# Altium PCB CORE_FPGA.PcbDoc (part 3 of 3)
Units mil, origin at the board's own origin, x right, y up, seen from the top; angles counter-clockwise.
Board outline 2362.21 x 2755.91 mil, 6 copper layers (TOP, GND, PWR1, PWR2, 3.3V, BOTTOM), stack 58.111 mil thick; 162 components, 160 nets, 858 pads, 377 vias.
Unrouted connection lines stored in the file: 4.
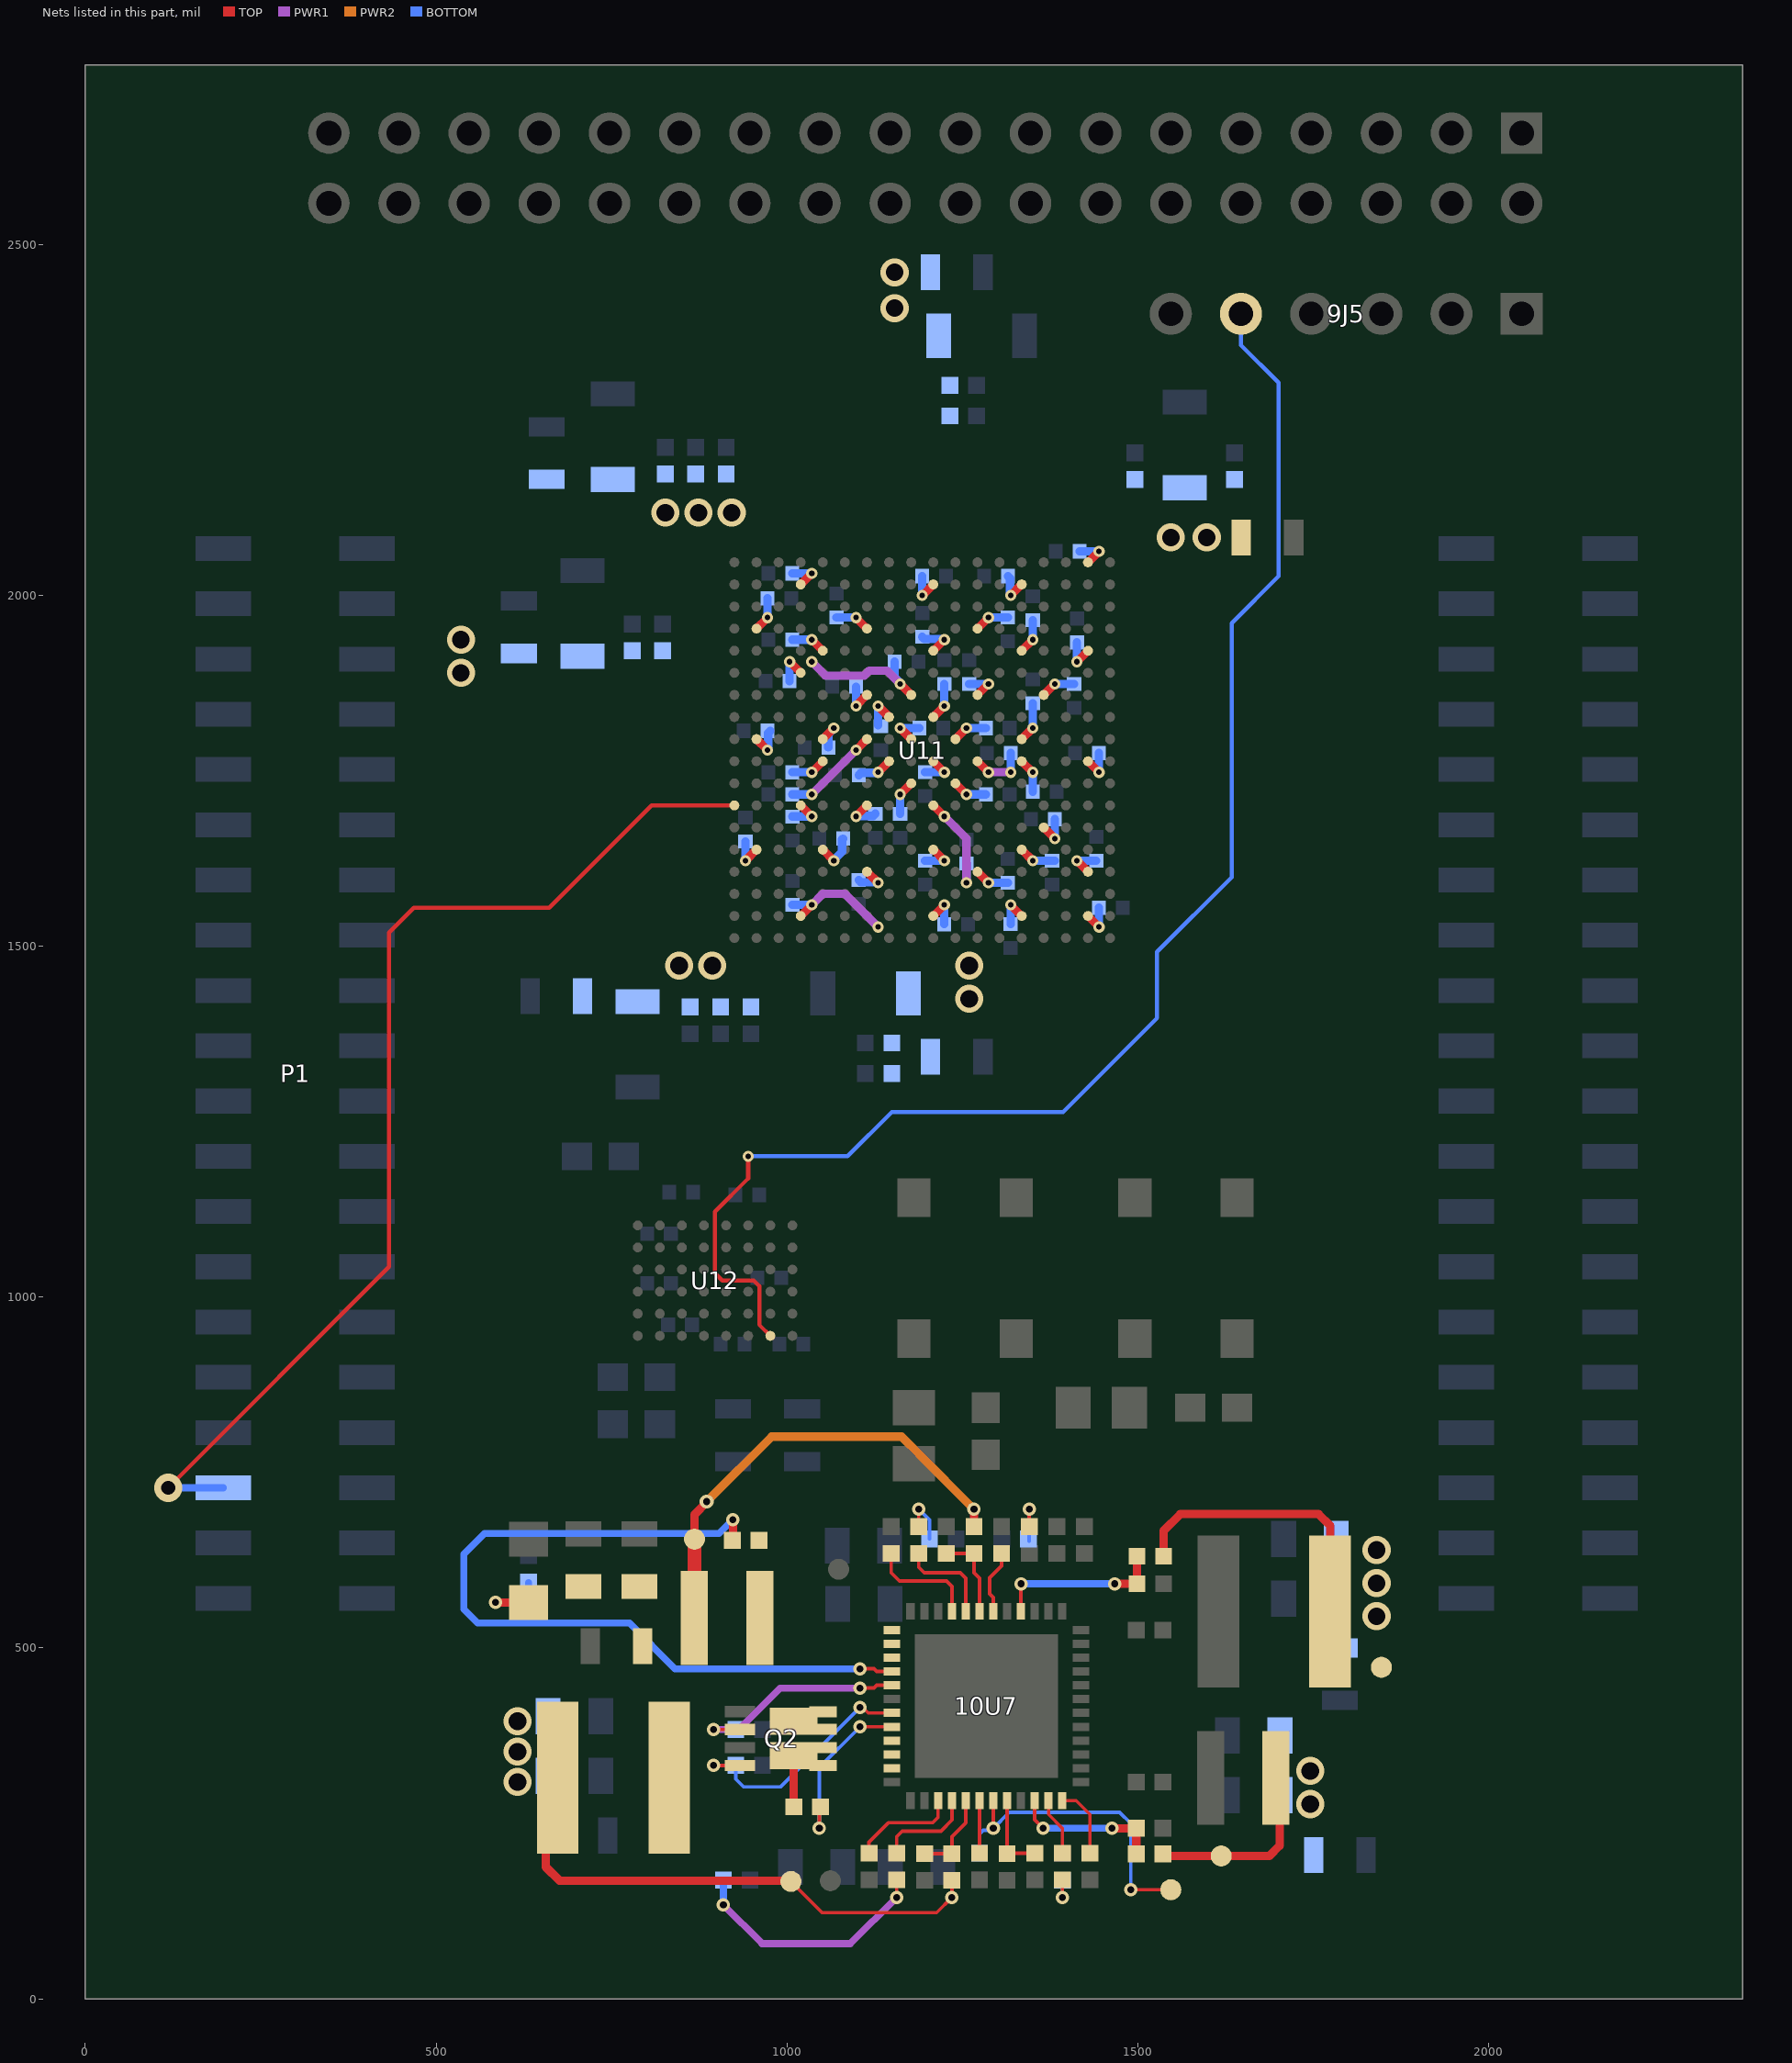
[diagram p7: the nets of this part, all layers, seen from the top]

## Via types
v1: diameter 16, hole 8, TOP to BOTTOM, 150 vias
v2: diameter 40, hole 25, TOP to BOTTOM, 114 vias
v3: diameter 19, hole 10, TOP to BOTTOM, 44 vias
v4: diameter 40, hole 20, TOP to BOTTOM, 44 vias
v5: diameter 20, hole 10, TOP to BOTTOM, 23 vias
v6: diameter 16, hole 10, TOP to BOTTOM, 2 vias

## Nets (pads, with @x,y where several pads share a name; then routed paths per layer and width w, separated by ;. In a path a pad name is that pad's centre, name@x,y a point inside that pad or via, vN(x,y) a via of type N, cw(c..) or ccw(c..) an arc to the next point about the centre after c; other vN are vias at no path point) (continued)
Net10U7_16: 10U7.16 R1134.2 R1135.2 | length 244.1
  TOP w5: 10U7.16@1333.59,552.13 v3(1333.59,591.5)
  TOP w12: v3(1467.45,591.5) R1135.2@1498.95,591.5 R1134.2@1498.95,630.87
  BOTTOM w10: v3(1333.59,591.5) v3(1467.45,591.5)
Net10U7_18: 10U7.18 R11118.2 | length 91.9
  TOP w5: 10U7.18@1294.22,552.13 1294.22,571.81 1289.03,577 1289.03,600.06 1306.03,617.06 R11118.2@1306.03,634.8
Net10U7_19: 10U7.19 R1130.1 R1131.1 | length 125.3
  TOP w5: R1131.1@1227.29,634.8 R1130.1@1266.66,634.8 1266.66,607.25 1274.54,599.37 10U7.19@1274.54,552.13
Net10U7_20: 10U7.20 R1119.2 | length 140.4
  TOP w5: R1119.2@1187.92,634.8 1187.92,615.12 1195.8,607.25 1246.98,607.25 1254.85,599.37 10U7.20@1254.85,552.13
Net10U7_21: 10U7.21 R1120.2 | length 157.8
  TOP w5: R1120.2@1148.55,634.8 1148.55,607.25 1160.37,595.43 1227.29,595.43 1235.17,587.56 10U7.21@1235.17,552.13
Net10U7_25: 10U7.25 10U7.26 10U7.27 C1019.1 L220.1 Q2.D1
Net10U7_28: 10U7.28 C1019.2 | length 1163.9
  TOP w5: C1019.2@923.16,652.91 C1019.2@924.53,651.54 ; v3(1104.26,470.43) 1123.95,470.43 1127.89,466.5 10U7.28@1149.54,466.5 10U7.28@1151.51,466.5
  TOP w12: C1019.2@923.16,652.91 v3(923.16,683.03)
  BOTTOM w10: v3@923.2,683.07 v3(923.16,683.03) 903.51,663.39 568.9,663.39 539.37,633.86 539.37,555.12 559.05,535.43 775.59,535.43 840.59,470.43 v3(1104.26,470.43)
Net10U7_29: 10U7.29 Q2.G1 R1129.2 | length 351.2
  TOP w5: v3(895.6,383.82) 933.2,383.82 Q2.G1@933.28,383.74 ; v3(1104.26,442.88) 1123.95,442.88 1127.89,446.81 10U7.29@1151.51,446.81
  PWR1 w10: v3(895.6,383.82) 931.2,383.82 990.26,442.88 v3(1104.26,442.88)
  BOTTOM w5: v3(895.6,383.82) R1129.2@927.1,383.82
Net10U7_31: 10U7.31 Q2.G2 R1128.1 | length 366.1
  TOP w5: v3(895.6,332.64) 933.2,332.64 Q2.G2@933.28,332.56 ; v3(1104.26,415.32) 1108.05,415.32 1115.93,407.44 10U7.31@1149.54,407.44
  BOTTOM w5: v3(895.6,332.64) R1128.1@927.1,332.64 927.1,313.14 938.05,302.18 991.13,302.18 1102.54,413.59 v3@1102.54,416.36
Net10U7_32: 10U7.32 C1016.1 | length 245.2
  TOP w5: v3(1046.19,243.07) 1046.19,272 C1016.1@1047.78,273.58 ; v3(1104.26,387.76) 10U7.32@1149.54,387.76
  BOTTOM w5: v3(1046.19,243.07) 1046.19,329.69 v3(1104.26,387.76)
Net10U7_33: 10U7.33 10U7.34 10U7.35 C1016.2 L218.1 Q2.D2 | length 70.9
  TOP w12: C1016.2@1009.78,273.58 Q2.D2@1009.78,344.45
Net10U7_39: 10U7.39 R1117.2 | length 152.5
  TOP w5: R1117.2@1117.06,207.64 1117.06,223.39 1144.62,250.95 1207.61,250.95 1215.48,258.82 10U7.39@1215.48,282.44
Net10U7_40: 10U7.40 R1116.2 | length 139.7
  TOP w5: R1116.2@1156.43,207.64 1156.43,231.26 1164.3,239.14 1219.42,239.14 1235.17,254.88 10U7.40@1235.17,282.44
Net10U7_41: 10U7.41 R1126.2 R1127.2 | length 122.6
  TOP w5: R1127.2@1195.8,207.64 R1127.2@1196.47,206.97 R1126.2@1235.16,206.97 ; R1126.2@1235.17,207.64 1235.17,231.26 1254.85,250.95 10U7.41@1254.85,282.44
Net10U7_42: 10U7.42 R1136.1 | length 74.8
  TOP w5: R1136.1@1274.54,207.64 10U7.42@1274.54,282.44
Net10U7_43: 10U7.43 C1014.1 TP110.1 | length 453.2
  TOP w5: v3(1294.22,243.07) 10U7.43@1294.22,282.44 ; v3(1490.09,155.47) TP110.1@1547.18,155.47
  BOTTOM w5: C1014.1@1274.54,207.64 1274.54,235.2 1279.73,240.39 1291.55,240.39 v3(1294.22,243.07) 1316.86,265.71 1474.34,265.71 1490.09,249.96 v3(1490.09,155.47)
Net10U7_44: 10U7.44 R1137.2 R1144.1 | length 114.5
  TOP w5: R1137.2@1313.9,206.97 1314.57,207.64 R1144.1@1353.28,207.64 ; R1137.2@1313.91,207.64 10U7.44@1313.91,282.44
Net10U7_46: 10U7.46 R1132.1 R1133.2 | length 217.7
  TOP w5: 10U7.46@1353.28,282.44 1353.28,255.3 1365.09,243.49 v3(1365.09,243.07)
  TOP w12: v3(1463.52,243.07) R1133.2@1497.96,243.07 R1132.1@1497.96,206.66 R1132.1@1495.01,203.7
  BOTTOM w10: v3(1365.09,243.07) v3(1463.52,243.07)
Net10U7_47: 10U7.47 R1121.2 | length 83
  TOP w5: 10U7.47@1372.96,282.44 1372.96,262.76 1392.65,243.07 R1121.2@1392.65,207.64
Net10U7_48: 10U7.48 R1154.2 | length 102.6
  TOP w5: 10U7.48@1392.65,282.44 1412.33,282.44 1432.02,262.76 R1154.2@1432.02,207.64
NetC1007_2: C1007.2 R1116.1 | length 356.9
  TOP w5: v3(1156.43,144.65) R1116.1@1156.43,168.95
  PWR1 w10: v3(909.45,133.86) 964.57,78.74 1090.52,78.74 v3(1156.43,144.65)
  BOTTOM w10: v3(909.45,133.86) C1007.2@909.45,169.29
NetC1009_2: C1009.2 R1119.1 | length 75.2
  TOP w5: R1119.1@1187.92,672.8 v3(1187.92,697.8)
  BOTTOM w5: v3@1188.31,699.25 1188.31,697.41 1203.31,682.41 C1009.2@1203.31,655.25
NetC1010_2: C1010.2 R1121.1 | length 47.9
  TOP w5: v3(1392.65,144.65) R1121.1@1392.65,168.95
  BOTTOM w5: v3(1392.65,144.65) C1010.2@1392.65,168.25
NetC1013_2: C1013.2 R1124.1 | length 70.6
  TOP w5: R1124.1@1345.41,672.8 v3(1345.41,697.8)
  BOTTOM w5: C1013.2@1345.31,652.25 1345.41,652.35 v3(1345.41,697.8)
NetC1017_2: C1017.2 C1018.2 L218.2 L219.1 R1126.1 TP12.1 | length 722.4
  TOP w5: TP12.1@1005.84,167.29 1050.33,122.8 1213.32,122.8 v3(1235.17,144.65) R1126.1@1235.17,168.95
  TOP w12: L218.2@656.43,270.63 656.43,187.95 676.11,168.27 TP12.1@1006.82,168.27
  other v2: 616.07,309.02 616.07,352.32 616.07,395.63
NetC1020_2: C1020.2 C1021.2 L220.2 L221.1 R1130.2 TP13.1 | length 624.5
  TOP w12: TP13.1@868.28,655.53 868.28,690.04 885.83,707.58 v5(885.83,708.66) ; R1130.2@1266.66,672.8 v3(1266.66,697.8)
  TOP w20: L220.2@864.11,580.67 868.34,584.9 TP13.1@868.34,655.18 TP13.1@868.04,655.47
  PWR2 w12: v5(885.83,708.66) 978.35,801.18 1163.39,801.18 1188.98,775.59 1188.98,775.49 1264.38,700.08 1267.01,700.08 v3@1267.72,700.79
NetC1023_2: C1023.2 C1024.2 L222.2 L223.1 R1132.2 TP14.1 | length 268.2
  TOP w12: R1132.2@1536.77,203.7 TP14.1@1619.03,203.7 1687.75,203.7 1702.32,218.27 L222.2@1702.32,314.92
  other v2: 1746,277.52 1746,324.77
NetC1026_2: C1026.2 C1027.2 L224.2 L225.1 R1134.1 TP15.1 | length 423.1
  TOP w12: R1134.1@1536.95,630.87 1536.95,667.08 1560.78,690.91 1757.81,690.91 1774.36,674.35 1774.36,544.92 L224.2@1772,542.55
  other v2: 1840.48,545.24 1840.48,592.48 1840.48,639.73
NetLED5_2: LED5.2 R1138.1 | length 118.1
  TOP w12: v3(584.58,564.92) LED5.2@631.82,564.92
  BOTTOM w10: v3(584.58,564.92) 623.95,564.92 631.82,572.8 R1138.1@631.82,593.17
OP_LED: P1.35 U11.V12 | length 1567.7
  TOP w6: v4(118.11,728.35) 433.07,1043.31 433.07,1519.68 468.5,1555.12 661.42,1555.12 807.09,1700.79 U11.V12@925.2,1700.79
  BOTTOM w10: v4(118.11,728.35) P1.35@196.85,728.35
TDI: 9J5.5 U12.G1 | length 2098
  TOP w6: v1(944.88,1200.79) 944.88,1169.29 897.64,1122.05 897.64,1033.91 907.92,1023.62 952.76,1023.62 960.63,1015.75 960.63,960.63 U12.G1@976.38,944.88
  BOTTOM w6: v1(944.88,1200.79) 1086.61,1200.79 1149.61,1263.78 1393.7,1263.78 1527.56,1397.64 1527.56,1492.13 1633.86,1598.43 1633.86,1960.63 1700.79,2027.56 1700.79,2303.15 1647.24,2356.69 9J5.5@1647.24,2401.57 9J5.5@1645.67,2401.57
VCCAUX: 10C37.1 10C38.2 10C39.2 10C40.2 10C41.2 10C42.2 10C43.2 10C44.2 10C45.2 10C46.2 10C47.2 10C48.2 10C49.2 10C50.2 10C51.2 10C52.2 10L5.1 U11.B1 U11.B17 U11.E5 U11.E9 U11.E14 U11.G10 U11.J12 U11.K7 U11.M9 U11.P5 U11.P10 U11.P14 | length 995.5
  TOP w12: v1(1035.43,1748.03) U11.P10@1051.18,1763.78 ; v1(1035.43,1937.01) U11.P5@1051.18,1921.26 ; U11.P14@1051.18,1637.8 v1(1066.93,1622.05) ; v1(1098.43,1779.53) U11.M9@1114.17,1795.28 ; v1(1161.42,1874.02) U11.K7@1177.17,1858.27 ; U11.J12@1208.66,1700.79 v1(1224.41,1685.04) ; U11.G10@1271.65,1763.78 v1(1287.4,1748.03) ; U11.E14@1334.65,1637.8 v1(1350.39,1622.05) ; U11.E9@1334.65,1795.28 v1(1350.39,1811.02) ; U11.E5@1334.65,1921.26 v1(1350.39,1937.01) ; U11.B17@1429.13,1543.31 v1(1444.88,1527.56) ; U11.B1@1429.13,2047.24 v1(1444.88,2062.99)
  PWR1 w12: v1(1035.43,1716.54) v1(1098.43,1779.53) ; v1(1035.43,1905.51) 1055.12,1885.83 1110.38,1885.83 1117.57,1893.02 1142.42,1893.02 v1(1161.42,1874.02) ; v1(1224.41,1685.04) 1255.91,1653.54 v1(1255.91,1590.55) ; v1(1287.4,1748.03) v1(1318.9,1748.03)
  BOTTOM w12: 10C41.2@1007.87,1716.54 v1(1035.43,1716.54) ; 10C40.2@1007.87,1748.03 v1(1035.43,1748.03) ; 10C42.2@1007.87,1937.01 v1(1035.43,1937.01) ; v1(1066.93,1622.05) 1066.93,1623.13 1078.74,1634.94 1078.74,1652.29 10C48.2@1079.99,1653.54 ; 10C43.2@1153.54,1905.51 1153.54,1882.97 1161.42,1875.1 v1(1161.42,1874.02) ; v1(1255.91,1590.55) 10C52.2@1255.91,1618.11 ; v1(1318.9,1748.03) 10C45.2@1318.9,1775.59 ; v1(1350.39,1622.05) 10C51.2@1377.95,1622.05 10C51.2@1381.89,1622.05 ; v1(1350.39,1811.02) 10C49.2@1350.39,1846.46 ; v1@1350.39,1940.94 10C44.2@1350.39,1964.57 ; 10C50.2@1417.32,2062.99 v1(1444.88,2062.99) ; v1(1444.88,1527.56) 10C47.2@1444.88,1555.12
  other v2: 846.46,1472.44 893.7,1472.44
VCCINT: 10C53.1 10C54.2 10C55.2 10C56.2 10C57.2 10C58.2 10C59.2 10C60.2 10C61.2 10C62.2 10C63.2 10C64.2 10C65.2 10C66.2 10C67.2 10L6.1 U11.G7 U11.H9 U11.H11 U11.J8 U11.J10 U11.K9 U11.K11 U11.L8 U11.L10 U11.M7 U11.M12 | length 555.3
  TOP w12: v1(1098.43,1685.04) U11.M12@1114.17,1700.79 ; v1(1098.43,1842.52) U11.M7@1114.17,1858.27 ; v1(1129.92,1748.03) U11.L10@1145.67,1763.78 ; v1(1129.92,1842.52) U11.L8@1145.67,1826.77 ; v1(1161.42,1716.54) U11.K11@1177.17,1732.28 ; v1(1161.42,1811.02) U11.K9@1177.17,1795.28 ; U11.J10@1208.66,1763.78 v1(1224.41,1748.03) ; U11.J8@1208.66,1826.77 v1(1224.41,1842.52) ; U11.H11@1240.16,1732.28 v1(1255.91,1716.54) ; U11.H9@1240.16,1795.28 v1(1255.91,1811.02) ; U11.G7@1271.65,1858.27 v1(1287.4,1874.02)
  BOTTOM w12: v1(1098.43,1685.04) 1099.19,1685.8 1122.81,1685.8 10C67.2@1125.98,1688.98 ; v1(1098.43,1842.52) 10C59.2@1098.43,1870.08 ; 10C58.2@1102.36,1744.09 1105.53,1747.27 1129.16,1747.27 v1(1129.92,1748.03) ; 10C66.2@1129.92,1814.96 v1(1129.92,1842.52) ; 10C64.2@1161.42,1688.98 v1(1161.42,1716.54) ; v1(1161.42,1811.02) 10C60.2@1188.98,1811.02 ; 10C65.2@1196.85,1748.03 v1(1224.41,1748.03) ; v1(1224.41,1842.52) 10C57.2@1224.41,1874.02 ; v1(1255.91,1716.54) 10C61.2@1283.46,1716.54 ; v1(1255.91,1811.02) 10C56.2@1283.46,1811.02 ; 10C63.2@1259.84,1874.02 v1(1287.4,1874.02)
  other v2: 826.77,2118.11 874.02,2118.11 921.26,2118.11
VCCO_B0: 3.1 10C1.1 10C2.2 10C3.2 10C4.2 10C5.2 10C6.2 10C7.2 10C8.2 10C9.2 U11.B5 U11.B10 U11.B15 U11.D7 U11.D13 U11.E10 | length 299
  TOP w12: U11.E10@1334.65,1763.78 v1(1350.39,1748.03) ; U11.D13@1366.14,1669.29 v1(1381.89,1653.54) ; U11.D7@1366.14,1858.27 v1(1381.89,1874.02) ; v1(1413.39,1622.05) U11.B15@1429.13,1606.3 ; v1(1413.39,1905.51) U11.B5@1429.13,1921.26 ; U11.B10@1429.13,1763.78 v1(1444.88,1748.03)
  BOTTOM w12: 10C7.2@1350.39,1720.47 v1(1350.39,1748.03) ; v1(1381.89,1653.54) 10C5.2@1381.89,1681.1 ; v1(1381.89,1874.02) 10C6.2@1409.45,1874.02 ; v1(1413.39,1622.05) 10C9.2@1440.94,1622.05 ; v1(1413.39,1905.51) 10C8.2@1413.39,1933.07 ; v1(1444.88,1748.03) 10C4.2@1444.88,1775.59
  other v2: 1547.24,2082.68 1598.43,2082.68
VCCO_B1: 10C10.1 10C11.2 10C12.2 10C13.2 10C14.2 10C15.2 10C16.2 10C17.2 10C18.2 10L2.1 U11.E17 U11.G15 U11.J14 U11.J17 U11.M15 U11.R17 | length 421.2
  TOP w12: U11.R17@1019.69,1543.31 v1(1035.43,1559.06) ; U11.M15@1114.17,1606.3 v1(1129.92,1590.55) ; U11.J17@1208.66,1543.31 v1(1224.41,1559.06) ; U11.J14@1208.66,1637.8 v1(1224.41,1622.05) ; U11.G15@1271.65,1606.3 v1(1287.4,1590.55) ; v1(1318.9,1559.06) U11.E17@1334.65,1543.31
  PWR1 w12: v1(1035.43,1559.06) 1051.18,1574.8 1082.68,1574.8 v1(1129.92,1527.56)
  BOTTOM w12: 10C13.2@1007.87,1559.06 v1(1035.43,1559.06) ; 10C17.2@1102.36,1594.49 1105.53,1591.32 1129.16,1591.32 v1(1129.92,1590.55) ; 10C14.2@1196.85,1622.05 v1(1224.41,1622.05) ; 10C16.2@1224.41,1531.5 v1(1224.41,1559.06) ; v1(1287.4,1590.55) 10C18.2@1314.96,1590.55 ; 10C15.2@1318.9,1531.5 v1(1318.9,1559.06)
  other v2: 1259.84,1425.2 1259.84,1472.44
VCCO_B2: 10C19.1 10C20.2 10C21.2 10C22.2 10C23.2 10C24.2 10C25.2 10C26.2 10C27.2 10L3.1 U11.P9 U11.R6 U11.R12 U11.U4 U11.U9 U11.U14 | length 303.9
  TOP w12: v1(940.94,1622.05) U11.U14@956.69,1637.8 ; U11.U9@956.69,1795.28 v1(972.44,1779.53) ; U11.U4@956.69,1952.76 v1(972.44,1968.5) ; v1(1003.94,1905.51) U11.R6@1019.69,1889.76 ; U11.R12@1019.69,1700.79 v1(1035.43,1685.04) ; U11.P9@1051.18,1795.28 v1(1066.93,1811.02)
  BOTTOM w12: v1(940.94,1622.05) 10C23.2@940.94,1649.61 ; v1(972.44,1779.53) 973.21,1780.29 973.21,1803.91 10C24.2@976.38,1807.09 ; v1(972.44,1968.5) 10C22.2@972.44,1996.06 ; 10C25.2@1003.94,1877.95 v1(1003.94,1905.51) ; 10C26.2@1007.87,1685.04 v1(1035.43,1685.04) ; 10C27.2@1059.06,1783.46 1059.06,1802.07 1066.93,1809.94 v1(1066.93,1811.02)
  other v2: 535.43,1889.76 535.43,1937.01
VCCO_B3: 10C28.1 10C29.2 10C30.2 10C31.2 10C32.2 10C33.2 10C34.2 10C35.2 10C36.2 10L4.1 U11.E2 U11.G4 U11.J2 U11.J5 U11.M4 U11.R2 | length 306.2
  TOP w12: U11.R2@1019.69,2015.75 v1(1035.43,2031.5) ; v1(1098.43,1968.5) U11.M4@1114.17,1952.76 ; v1(1192.91,2000) U11.J2@1208.66,2015.75 ; U11.J5@1208.66,1921.26 v1(1224.41,1937.01) ; U11.G4@1271.65,1952.76 v1(1287.4,1968.5) ; v1(1318.9,2000) U11.E2@1334.65,2015.75
  BOTTOM w12: 10C34.2@1007.87,2031.5 v1(1035.43,2031.5) ; 10C36.2@1070.87,1968.5 v1(1098.43,1968.5) ; 10C32.2@1192.91,1940.94 1196.09,1937.77 1223.64,1937.77 v1(1224.41,1937.01) ; v1(1192.91,2000) 10C31.2@1192.91,2027.56 ; v1(1287.4,1968.5) 10C33.2@1314.96,1968.5 ; 10C35.2@1314.96,2027.56 1318.13,2024.39 1318.13,2000.77 v1(1318.9,2000)
  other v2: 1153.54,2409.45 1153.54,2460.63
pads on no net: U11.A5 U11.A6 U11.A14 U11.A16 U11.B16 U11.C4 U11.C5 U11.C6 U11.C8 U11.C9 U11.C10 U11.C11 U11.C12 U11.C14 U11.C15 U11.D4 U11.D9 U11.D11 U11.D12 U11.D14 U11.E3 U11.E4 U11.E6 U11.E7 U11.E8 U11.E11 U11.E12 U11.E13 U11.F4 U11.F5 U11.F6 U11.F7 U11.F8 U11.F9 U11.F10 U11.F11 U11.F12 U11.F13 U11.F14 U11.F15 U11.F16 U11.G3 U11.G6 U11.G8 U11.G9 U11.G11 U11.G13 U11.G14 U11.G16 U11.G18 U11.H3 U11.H4 U11.H5 U11.H6 U11.H7 U11.H12 U11.H13 U11.H14 U11.H15 U11.H16 U11.H18 U11.J6 U11.J7 U11.J13 U11.J16 U11.J18 U11.K5 U11.K6 U11.K12 U11.K13 U11.K14 U11.K15 U11.K16 U11.K17 U11.K18 U11.L5 U11.L7 U11.L12 U11.L13 U11.L14 U11.L16 U11.L17 U11.L18 U11.M5 U11.M8 U11.M10 U11.M11 U11.M13 U11.M14 U11.M16 U11.M18 U11.N3 U11.N4 U11.N5 U11.N7 U11.N8 U11.N9 U11.N10 U11.N11 U11.N12 U11.N14 U11.N15 U11.N17 U11.P3 U11.P4 U11.P6 U11.P8 U11.P11 U11.P12 U11.P13 U11.P15 U11.P16 U11.R3 U11.R5 U11.R7 U11.R11 U11.T3 U11.T4 U11.T7 U11.T8 U11.T9 U11.T10 U11.T11 U11.T12 U11.T13 U11.T15 U11.U7 U11.U8 U11.U16 U11.V3 U11.V7 U11.V8 U11.V9 U11.V16 U12.A4 U12.A5 U12.A6 U12.B5 U12.C1 U12.C2 U12.C3 U12.C4 U12.C5 U12.D2 U12.D3 U12.D4 U12.D5 U12.E3 U12.E4 U12.E5 U12.F2 U12.F3 U12.F4 U12.G2 U12.H5

## Polygon pours and split planes (outlines as drawn)
no net on Top Overlay (solid): 196.85,2755.91 0,2559.06 0,2755.91
FLASH_1.8V on PWR1 "PWR1-FLASH_1.8V" (solid, pour order 32): 1897.64,309.06 1799.21,309.06 1779.53,289.37 1779.53,259.84 1759.84,240.16 1730.31,240.16 1710.63,259.84 1710.63,594.49 1631.89,673.23 1080.71,673.23 1061.02,692.91 1061.02,751.97 1051.18,761.81 972.44,761.81 962.6,751.97 962.6,535.43 992.13,505.91 1533.46,505.91 1572.83,466.54 1572.83,151.58 1612.2,112.2 1897.64,112.2 1917.32,131.89 1917.32,289.37
CFPGA_2.5V on PWR1 "PWR1-CFPGA_2.5V" (solid, pour order 36): 1781.5,328.74 1730.31,379.92 1730.31,639.76 1312.99,1057.09 1198.82,1057.09 903.54,1352.36 559.06,1352.36 529.53,1381.89 529.53,1529.53 559.06,1559.06 992.13,1559.05 1031.5,1519.68 1070.87,1519.68 1307.09,1283.46 1444.88,1283.46 1966.54,761.81 1966.54,358.27 1937.01,328.74
CFPGA_1.2V on PWR1 "PWR1-CFPGA_1.2V" (solid, pour order 30): 992.13,171.26 982.28,161.42 883.86,161.42 824.8,102.36 362.2,102.36 303.15,161.42 155.51,309.06 155.51,2316.93 214.57,2375.98 706.69,2375.98 726.38,2356.3 726.38,2218.5 706.69,2198.82 391.73,2198.82 362.2,2169.29 362.2,397.64 431.1,328.74 490.16,269.69 736.22,269.69 775.59,309.06 952.75,309.06 992.13,269.69
"FLASH 3.3V" on PWR1 "PWR1-FLASH 3.3V" (solid, pour order 24): 1051.18,811.02 1070.87,830.71 1070.87,1106.3 952.76,1224.41 755.91,1224.41 736.22,1204.72 736.22,830.71 755.91,811.02
no net on PWR1 "PWR1-No Net" (solid, pour order 22): 775.59,830.71
no net on PWR1 "PWR1-No Net 1" (solid, pour order 18): 1051.18,1214.57
VCCO_B2 on PWR1 "PWR1-VCCO_B2" (solid, pour order 8): 984.25,1594.49 885.83,1594.49 807.09,1673.23 807.09,1791.34 748.03,1850.39 492.13,1850.39 472.44,1870.08 472.44,1988.19 492.13,2007.87 994.09,2007.87 1082.68,1919.29 1082.68,1692.91
VCCO_B0 on PWR1 "PWR1-VCCO_B0" (solid, pour order 12): 1643.7,2116.14 1663.39,2096.46 1663.39,1624.02 1633.86,1594.49 1407.48,1594.49 1328.74,1673.23 1328.74,1860.24 1496.06,2027.56 1496.06,2106.3 1505.91,2116.14
VCCO_B3 on PWR1 "PWR1-VCCO_B3" (solid, pour order 10): 1122.05,1919.29 1013.78,2027.56 1013.78,2440.94 1072.83,2500 1200.79,2500 1348.43,2352.36 1348.43,1968.5 1299.21,1919.29
VCCO_B1 on PWR1 "PWR1-VCCO_B1" (solid, pour order 6): 1228.35,1397.64 1070.87,1555.12 1070.87,1606.3 1118.11,1653.54 1289.37,1653.54 1338.58,1604.33 1338.58,1417.32 1318.9,1397.64
+5VCC on PWR2 "PWR2-+5VCC" (solid, pour order 28): 1543.31,673.23 1582.68,633.86 1582.68,131.89 1533.46,82.68 273.62,82.68 165.35,190.94 165.35,1765.75 145.67,1785.43 86.61,1785.43 57.09,1814.96 57.09,2169.29 283.46,2169.29 431.1,2021.65 431.1,474.41 452.76,452.76 742.13,452.76 962.6,673.23
1.8V_F on PWR2 "PWR2-1.8V_F" (solid, pour order 26): 1070.87,850.39 1070.87,1204.72 1051.18,1224.41 755.91,1224.41 736.22,1204.72 736.22,850.39 755.91,830.71 1051.18,830.71
VCCAUX on PWR2 "PWR2-VCCAUX" (solid, pour order 16): 1342.52,2102.36 1334.65,2094.49 1334.65,1787.4 1307.09,1759.84 1307.09,1649.61 1295.28,1637.8 1062.99,1637.8 1047.24,1653.54 1047.24,1952.76 1031.5,1968.5 834.65,1968.5 791.34,1925.2 791.34,1421.26 791.34,1385.83 807.09,1370.08 1291.34,1370.08 1318.9,1397.64 1476.38,1397.64 1492.13,1413.39 1492.13,2043.31 1433.07,2102.36
VCCINT on PWR2 "PWR2-VCCINT" (solid, pour order 14): 1291.34,1673.23 1291.34,1767.72 1318.9,1795.28 1318.9,2094.49 1299.21,2114.17 1200.79,2212.6 803.15,2212.6 783.46,2192.91 783.46,2094.49 803.15,2074.8 952.76,2074.8 1059.05,1968.5 1059.06,1661.42 1066.93,1653.54 1185.04,1653.54 1271.65,1653.54
CFPGA_3.3V on 3.3V "3.3V-CFPGA_3.3V" (solid, pour order 0): 2362.2,2755.91 2362.2,0 0,0 0,2755.91
GND on GND "GND-GND" (solid, pour order 2): 2362.2,2755.91 2362.2,0 0,0 0,2755.91

## Other copper
TOP:
  region net CFPGA_3.3V: 1700.79,2055.12 1700.79,2110.24 1708.66,2118.11 1850.39,2118.11 1858.27,2110.24 1858.27,2055.12 1850.39,2047.24 1708.66,2047.24
  region net VCCO_B0: 1673.23,2110.24 1673.23,2055.12 1665.35,2047.24 1523.62,2047.24 1515.75,2055.12 1515.75,2110.24 1523.62,2118.11 1665.35,2118.11
  region net GND: 1677.17,1114.17 1669.29,1106.3 1578.74,1106.3 1570.87,1114.17 1570.87,1216.54 1578.74,1224.41 1665.35,1224.41 1677.17,1212.6
  region net CFPGA_3.3V: 1220.47,818.9 1212.6,811.02 1102.36,811.02 1094.49,818.9 1094.49,976.38 1102.36,984.25 1212.6,984.25 1220.47,976.38
  region net CFPGA_3.3V: 1464.57,748.03 1456.69,755.91 1456.69,976.38 1464.57,984.25 1586.61,984.25 1594.49,976.38 1594.49,755.91 1586.61,748.03
  region net NetC1023_2: 1675.13,379.88 1683,387.76 1746,387.76 1753.87,379.88 1753.87,352.32 1769.62,336.58 1769.62,281.46 1769.62,249.96 1761.74,242.09 1683,242.09 1675.13,249.96
  region net NetC1026_2: 1871.98,442.88 1871.98,659.41 1864.11,667.29 1751.1,667.29 1740.33,656.52 1740.33,443.92 1749.25,435 1864.11,435
  region: 1856.23,446.81
  region net +5VCC: 1405.44,401.54 1403.48,403.51 1403.48,431.06 1405.44,433.03 1558.99,433.03 1560.96,431.06 1560.96,403.51 1558.99,401.54
  region net Net10U7_8: 1407.5,440.91 1653.48,440.91 1665.29,452.72 1665.29,657.44 1651.51,671.22 1580.64,671.22 1568.83,659.41 1568.83,560.99 1560.96,553.11 1525.52,553.11 1519.62,547.21 1519.62,501.07 1512.85,494.3 1460.81,494.3 1438.91,472.4 1407.47,472.4 1405.44,470.38 1405.44,442.96
  region net Net10U7_4: 1403.48,366.13 1403.48,391.69 1405.35,393.57 1627.98,393.57 1641.66,379.88 1641.66,247.99 1633.79,240.12 1572.77,240.12 1566.86,246.03 1566.86,277.52 1557.02,287.36 1523.55,287.36 1519.62,291.3 1519.62,337.53 1512.85,344.3 1458.75,344.3 1440.77,362.27 1407.33,362.27
  region net +5VCC: 1069.81,266.69 1069.81,231.26 1077.69,223.39 1101.31,223.39 1144.62,266.69
  region net +5VCC: 1201.53,264.56 1199.74,262.76 1069.81,262.76 1069.81,310 1074.58,314.77 1167.41,314.77 1176.11,306.06 1199.74,306.06 1201.53,304.27
  region net NetC1017_2: 702.33,198.78 702.33,431.06 600.33,431.06 592.45,423.19 592.45,206.66 600.33,198.78
  region net CFPGA_3.3V: 739.78,462.8 739.77,542.8 733.4,549.17 683,549.17 675.13,541.3 675.13,529.49 667.26,521.62 442.88,521.62 437.01,515.75 437.01,460.63 440.95,456.69 733.67,456.69
  region net NetC1020_2: 887.73,466.5 895.6,474.37 895.6,612.17 887.73,620.04 686.94,620.04 683,616.1 683,567.8 688.33,562.47 764.2,562.47 774.78,551.89 774.78,473.15 781.43,466.5
  region net Net10U7_33: 1025.52,320.83 1021.59,316.89 1021.59,257.84 1009.78,246.03 879.85,246.03 871.98,238.15 871.98,206.66 864.11,198.78 793.24,198.78 785.37,206.66 785.37,423.19 793.24,431.06 864.11,431.06 871.98,423.19 871.98,305.08 879.85,297.21 962.53,297.21 970.41,305.08 970.41,332.64 1025.52,332.64
  region net Net10U7_33: 1165.29,373.97 1118.04,373.97 1109.74,365.67 971.94,365.67 970.41,364.14 970.41,324.77 972.3,322.87 1165.36,322.87 1167.26,324.77 1167.26,372.01
  region net Net10U7_25: 1161.64,480.57 1121.69,480.57 1112.96,489.3 1083.76,489.3 1076.7,482.25 1076.7,446.81 1076.7,379.88 1073.19,376.37 976.55,376.37 976.55,452.48 962.53,466.5 934.97,466.5 927.1,474.37 927.1,616.1 946.78,635.79 946.78,663.35 950.72,667.29 990.09,667.29 994.03,663.35 994.03,545.24 1007.99,531.27 1161.54,531.27 1163.32,529.49 1163.32,482.25
  region net +5VCC: 1222.37,537.36 1171.19,537.36 1167.26,541.3 1021.59,541.3 1009.78,553.11 1009.78,671.22 1013.71,675.16 1098.79,675.16 1104.26,669.69 1104.26,592.48 1112.14,584.61 1214.5,584.61 1222.37,576.73
  region net GND: 823.01,640.77 830.88,648.64 830.88,723.44 813.54,740.78 618.74,740.78 590.72,712.77 590.72,648.64 598.6,640.77
BOTTOM:
  region net +5VCC: 251.97,1803.15 259.84,1811.02 259.84,2149.61 251.97,2157.48 66.93,2157.48 59.05,2149.61 59.05,1811.02 66.93,1803.15
  region net GND: 1511.81,2192.91 1476.38,2192.91 1472.44,2196.85 1472.44,2228.35 1464.57,2236.22 1523.62,2236.22 1515.75,2228.35 1515.75,2224.41 1515.75,2196.85
  region net GND: 1657.48,2240.16 1657.48,2196.85 1653.54,2192.91 1622.05,2192.91 1618.11,2196.85 1618.11,2228.35 1610.24,2236.22 1610.24,2240.16
  region: 1657.48,2236.22
  region net GND: 1372.05,476.38 1348.43,500 1218.5,500 1194.88,476.38 1194.88,358.27 1218.5,334.65 1348.43,334.65 1372.05,358.27
  region net CFPGA_3.3V: 2224.41,677.17 2232.28,669.29 2232.28,342.52 2224.41,334.65 1917.32,334.65 1909.45,342.52 1909.45,669.29 1917.32,677.17
  region net CFPGA_3.3V: 641.73,1968.5 649.61,1976.38 649.61,2059.06 641.73,2066.93 555.12,2066.93 547.24,2059.06 547.24,1996.06 574.8,1968.5
  region net GND: 1657.48,2232.28 1657.48,2259.84 1566.93,2350.39 1523.62,2350.39 1500,2374.02 1500,2433.07 1492.13,2440.94 1421.26,2440.94 1409.45,2429.13 1389.76,2409.45 1314.96,2409.45 1307.09,2401.57 1307.09,2326.77 1299.21,2318.9 1267.72,2318.9 1259.84,2311.02 1259.84,2240.16 1267.72,2232.28
  region net VCCO_B0: 1649.61,2177.17 1657.48,2169.29 1657.48,2043.31 1649.61,2035.43 1500,2035.43 1492.13,2043.31 1492.13,2102.36 1472.44,2122.05 1472.44,2169.29 1480.31,2177.17
  region net CFPGA_3.3V: 1259.84,2433.07 1267.72,2425.2 1370.08,2425.2 1377.95,2433.07 1377.95,2507.87 1370.08,2515.75 1267.72,2515.75 1259.84,2507.87
  region net VCCO_B3: 1244.09,2240.16 1236.22,2232.28 1181.1,2232.28 1173.23,2240.16 1173.23,2303.15 1118.11,2358.27 1118.11,2496.06 1125.98,2503.94 1224.41,2503.94 1232.28,2496.06 1232.28,2429.13 1244.09,2417.32
  region: 1240.16,2232.28
  region net CFPGA_1.2V: 681.1,2216.54 688.98,2224.41 688.98,2314.96 681.1,2322.83 559.05,2322.83 551.18,2314.96 551.18,2224.41 559.06,2216.54
  region net GND: 940.94,2200.79 948.82,2208.66 948.82,2314.96 940.94,2322.83 716.54,2322.83 708.66,2314.96 708.66,2255.91 728.35,2236.22 799.21,2236.22 807.09,2228.35 807.09,2208.66 814.96,2200.79
  region net VCCINT: 940.95,2185.04 948.82,2177.17 948.82,2094.49 940.94,2086.61 622.05,2086.61 614.17,2094.49 614.17,2177.17 622.05,2185.04
  region net GND: 854.33,1948.82 862.2,1956.69 862.2,2059.06 854.33,2066.93 673.23,2066.93 665.35,2059.05 665.35,1956.69 673.23,1948.82
  region net VCCO_B2: 590.55,1925.2 547.24,1968.5 507.87,1968.5 500,1960.63 500,1925.2
  region net VCCO_B2: 842.52,1933.07 503.94,1933.07 500,1929.13 500,1866.14 507.87,1858.27 842.52,1858.27 850.39,1866.14 850.39,1925.2
  region net GND: 964.57,1385.83 972.44,1377.95 972.44,1248.03 960.63,1236.22 755.91,1236.22 744.09,1248.03 744.09,1318.9 751.97,1326.77 838.58,1326.77 842.52,1330.71 842.52,1377.95 850.39,1385.83
  region net CFPGA_2.5V: 657.48,1496.06 649.61,1503.94 562.99,1503.94 555.12,1496.06 555.12,1393.7 562.99,1385.83 649.61,1385.83 657.48,1393.7
  region net VCCAUX: 964.57,1401.57 972.44,1409.45 972.44,1492.13 964.57,1500 696.85,1500 688.98,1492.13 688.98,1409.45 696.85,1401.57
  region net GND: 1121.57,1298.74 1062.99,1240.16 1003.94,1240.16 996.06,1248.03 996.06,1307.09 1118.11,1307.09 1122.05,1307.09 1122.05,1299.21
  region net GND: 1114.17,1295.28 1122.05,1303.15 1122.05,1377.95 1114.17,1385.83 1090.55,1385.83 1082.68,1393.7 1082.68,1468.5 1074.8,1476.38 1003.94,1476.38 996.06,1468.5 996.06,1303.15 1003.94,1295.28
  region net VCCO_B1: 1145.67,1295.28 1137.8,1303.15 1137.8,1480.31 1153.54,1496.06 1275.59,1496.06 1291.34,1480.32 1291.34,1409.45 1283.46,1401.57 1244.09,1401.57 1236.22,1393.7 1236.22,1303.15 1228.35,1295.28
  region net CFPGA_3.3V: 1267.72,1389.76 1259.84,1381.89 1259.84,1303.15 1267.72,1295.28 1350.39,1295.28 1358.27,1303.15 1358.27,1381.89 1350.39,1389.76
  region: 1460.63,803.15
  region net FLASH_1.8V: 1808.99,171.22 1801.11,179.1 1801.11,289.15 1810.21,298.25 1893.87,298.25 1901.75,290.37 1901.75,180.14 1892.83,171.22
  region net NetC1023_2: 1765.68,171.22 1773.55,179.1 1773.55,328.7 1730.25,372.01 1730.25,407.44 1722.37,415.32 1686.94,415.32 1679.07,407.44 1679.07,179.1 1686.94,171.22
  region net CFPGA_2.5V: 1753.87,442.88 1761.74,450.75 1852.29,450.75 1860.17,442.88 1860.17,356.26 1852.3,348.39 1769.62,348.39 1753.87,364.14
  region net NetC1026_2: 1753.87,678.84 1753.87,482.25 1761.74,474.37 1852.29,474.37 1865.39,487.47 1865.39,675.36 1855.39,685.36 1760.39,685.36
  region net +5VCC: 1069.81,313.94 1065.88,310 1065.88,227.32 1061.94,223.39 1046.19,223.39 1042.26,219.45 1042.26,164.33 1046.19,160.4 1162.37,160.4 1169.78,167.8 1169.77,217.8 1164.18,223.39 1124.93,223.39 1121,227.32 1121,310 1117.06,313.94
  region net CFPGA_1.2V: 726.31,277.52 718.44,269.65 718.44,201.7 725.29,194.84 966.47,194.84 974.34,202.72 974.34,269.65 966.47,277.52
  region net NetC1017_2: 684.77,197.8 690.88,203.9 690.88,431.69 684.77,437.8 599.77,437.8 592.45,430.47 592.45,205.12 599.77,197.8
  region net +5VCC: 1099.78,532.8 1104.26,537.29 1104.26,656.68 1084.17,676.78 1015.34,676.78 1007.87,669.32 1007.87,549.7 1024.78,532.8
  region: 1202.69,533.43

## Silkscreen, mask and mechanical layers (free items; w line width, h text height)
Top Overlay:
  lines w5: 1188.98,1779.53 1196.85,1779.53 ; 1192.91,1775.59 1192.91,1783.46 ; 1120.08,610.2 1120.08,714.57 1448.04,714.57 1448.04,610.2 1120.08,610.2 ; 1907.48,62.99 1907.48,210.63 2251.97,210.63 2251.97,72.83 2251.97,62.99 1907.48,62.99
  lines w10: 897.64,1484.25 897.64,1488.19 ; 897.64,2070.87 897.64,2078.74
  text "A" at 1355.31,727.36 h40
  text "3.3V" at 354.33,476.38 h23
  text "A" at 2074.8,230.32 h40
  text "1.8V" at 1645.67,181.1 h23
Assy TOP (M11):
  text "ASSEMBLY NOTES:" at 4068.07,13663.51 h100
  text "1. WORKMANSHIP TO BE COMPLIANT WITH IPC-A-610, CLASS 2." at 4047.26,13562.08 h100
  text "2. ALL UNUSED THROUGH HOLE COMPONENT LOCATIONS SHALL BE FREE OF SOLDER." at 4047.26,13443.97 h100
  text "3. ALL COMPONENTS SHALL BE MOUNTED FLUSH TO THE BOARD, EXCEPT AS NOTED." at 4047.26,13325.86 h100
  text "4. FINISHED BOARD SHALL BE FREE OF ALL RESIDUES." at 4047.26,13207.75 h100
  text "5. THIS ASSEMBLY CONTAINS ELECTROSTATIC DISCHARGE (ESD) SENSITIVE DEVICES; STATIC-FREE HANDLING IS REQUIRED." at 4047.26,13089.64 h100
  text "6. PRODUCT WILL BE ASSEMBLED USING RoHS COMPLIANT MANUFACTURING PROCESS AND COMPONENTS." at 4050.26,12963.64 h100
  text "7. PLACE SERIAL NUMBER LABEL INSIDE \"S/N\" BOX ON TOP SIDE SILK." at 4050.3,12853.35 h100
  text ".ProjectBoardLabel" at -1544.77,660.56 h20
TITLE (M16):
  lines w5: -766.82,888.11 -566.82,888.11 ; -766.82,3563.11 -566.82,3563.11 ; -766.82,6238.11 -566.82,6238.11 ; -766.82,8913.11 -566.82,8913.11 ; -766.82,11588.11 -566.82,11588.11 ; 2008.18,-2011.89 2008.18,-1811.89 ; 2008.18,14288.11 2008.18,14488.11 ; 4583.18,-2011.89 4583.18,-1811.89 ; 4583.18,14288.11 4583.18,14488.11 ; 7158.18,-2011.89 7158.18,-1811.89 ; 7158.18,14288.11 7158.18,14488.11 ; 9733.18,-2011.89 9733.18,-1811.89 ; 9733.18,14288.11 9733.18,14488.11 ; 12308.18,-2011.89 12308.18,-1811.89 ; 12308.18,14288.11 12308.18,14488.11 ; 14883.18,-2011.89 14883.18,-1811.89 ; 14883.18,14288.11 14883.18,14488.11 ; 17458.18,-2011.89 17458.18,-1811.89 ; 17458.18,14288.11 17458.18,14488.11 ; 20033.18,888.11 20233.18,888.11 ; 20033.18,3563.11 20233.18,3563.11 ; 20033.18,6238.11 20233.18,6238.11 ; 20033.18,8913.11 20233.18,8913.11 ; 20033.18,11588.11 20233.18,11588.11 ; -766.82,-2011.89 -766.82,14488.11 20233.18,14488.11 20233.18,-2011.89 -766.82,-2011.89 ; -566.82,-1811.89 -566.82,14288.11 20033.18,14288.11 20033.18,-1811.89 -566.82,-1811.89
  text "1" at 608.18,14363.11 h80
  text "2" at 3258.18,14363.11 h80
  text "3" at 5883.18,14363.11 h80
  text "4" at 8408.18,14363.11 h80
  text "5" at 11008.18,14363.11 h80
  text "6" at 13583.18,14363.11 h80
  text "7" at 16208.18,14363.11 h80
  text "8" at 18708.18,14363.11 h80
  text "A" at -666.82,12963.11 h80
  text "A" at 20133.18,12963.11 h80
  text "B" at -666.82,10213.11 h80
  text "B" at 20133.18,10213.11 h80
  text "C" at -666.82,7613.11 h80
  text "C" at 20133.18,7613.11 h80
  text "D" at -666.82,4938.11 h80
  text "D" at 20133.18,4938.11 h80
  text "E" at -666.82,2263.11 h80
  text "E" at 20133.18,2263.11 h80
  text "F" at -666.82,-511.89 h80
  text "F" at 20133.18,-511.89 h80
  text "1" at 488.18,-1931.89 h80
  text "2" at 3138.18,-1931.89 h80
  text "3" at 5763.18,-1931.89 h80
  text "4" at 8288.18,-1931.89 h80
  text "5" at 10888.18,-1931.89 h80
  text "6" at 13463.18,-1931.89 h80
  text "7" at 16088.18,-1931.89 h80
  text "8" at 18588.18,-1931.89 h80
Drill Drawing:
  the board outline again, w5
TITLE MIRROR (M17):
  lines w5: -766.82,888.11 -566.82,888.11 ; -766.82,3563.11 -566.82,3563.11 ; -766.82,6238.11 -566.82,6238.11 ; -766.82,8913.11 -566.82,8913.11 ; -766.82,11588.11 -566.82,11588.11 ; 2008.18,-2011.89 2008.18,-1811.89 ; 2008.18,14288.11 2008.18,14488.11 ; 4583.18,-2011.89 4583.18,-1811.89 ; 4583.18,14288.11 4583.18,14488.11 ; 7158.18,-2011.89 7158.18,-1811.89 ; 7158.18,14288.11 7158.18,14488.11 ; 9733.18,-2011.89 9733.18,-1811.89 ; 9733.18,14288.11 9733.18,14488.11 ; 12308.18,-2011.89 12308.18,-1811.89 ; 12308.18,14288.11 12308.18,14488.11 ; 14883.18,-2011.89 14883.18,-1811.89 ; 14883.18,14288.11 14883.18,14488.11 ; 17458.18,-2011.89 17458.18,-1811.89 ; 17458.18,14288.11 17458.18,14488.11 ; 20033.18,888.11 20233.18,888.11 ; 20033.18,3563.11 20233.18,3563.11 ; 20033.18,6238.11 20233.18,6238.11 ; 20033.18,8913.11 20233.18,8913.11 ; 20033.18,11588.11 20233.18,11588.11 ; -766.82,-2011.89 -766.82,14488.11 20233.18,14488.11 20233.18,-2011.89 -766.82,-2011.89 ; -566.82,-1811.89 -566.82,14288.11 20033.18,14288.11 20033.18,-1811.89 -566.82,-1811.89
  text "8" at 758.18,14363.11 h80
  text "7" at 3258.18,14363.11 h80
  text "6" at 5883.18,14363.11 h80
  text "5" at 8458.18,14363.11 h80
  text "4" at 11058.18,14363.11 h80
  text "3" at 13583.18,14363.11 h80
  text "2" at 16208.18,14363.11 h80
  text "1" at 18858.18,14363.11 h80
  text "A" at -666.82,12963.11 h80
  text "A" at 20133.18,12963.11 h80
  text "B" at -666.82,10213.11 h80
  text "B" at 20133.18,10213.11 h80
  text "C" at -666.82,7613.11 h80
  text "C" at 20133.18,7613.11 h80
  text "D" at -666.82,4938.11 h80
  text "D" at 20133.18,4938.11 h80
  text "E" at -666.82,2263.11 h80
  text "E" at 20133.18,2263.11 h80
  text "F" at -666.82,-511.89 h80
  text "F" at 20133.18,-511.89 h80
  text "8" at 878.18,-1931.89 h80
  text "7" at 3378.18,-1931.89 h80
  text "6" at 6003.18,-1931.89 h80
  text "5" at 8578.18,-1931.89 h80
  text "4" at 11178.18,-1931.89 h80
  text "3" at 13703.18,-1931.89 h80
  text "2" at 16328.18,-1931.89 h80
  text "1" at 18978.18,-1931.89 h80

## Text inside footprints (layer, text, board x,y; h text height)
9P1: Top Overlay "2" at 2122.05,2543.31 h30; Top Overlay "1" at 2125.98,2645.67 h30; Top Overlay "35" at 228.35,2645.67 h30; Top Overlay "36" at 228.35,2543.31 h30